# EAGLE board Evals (EAGLE 4.16)
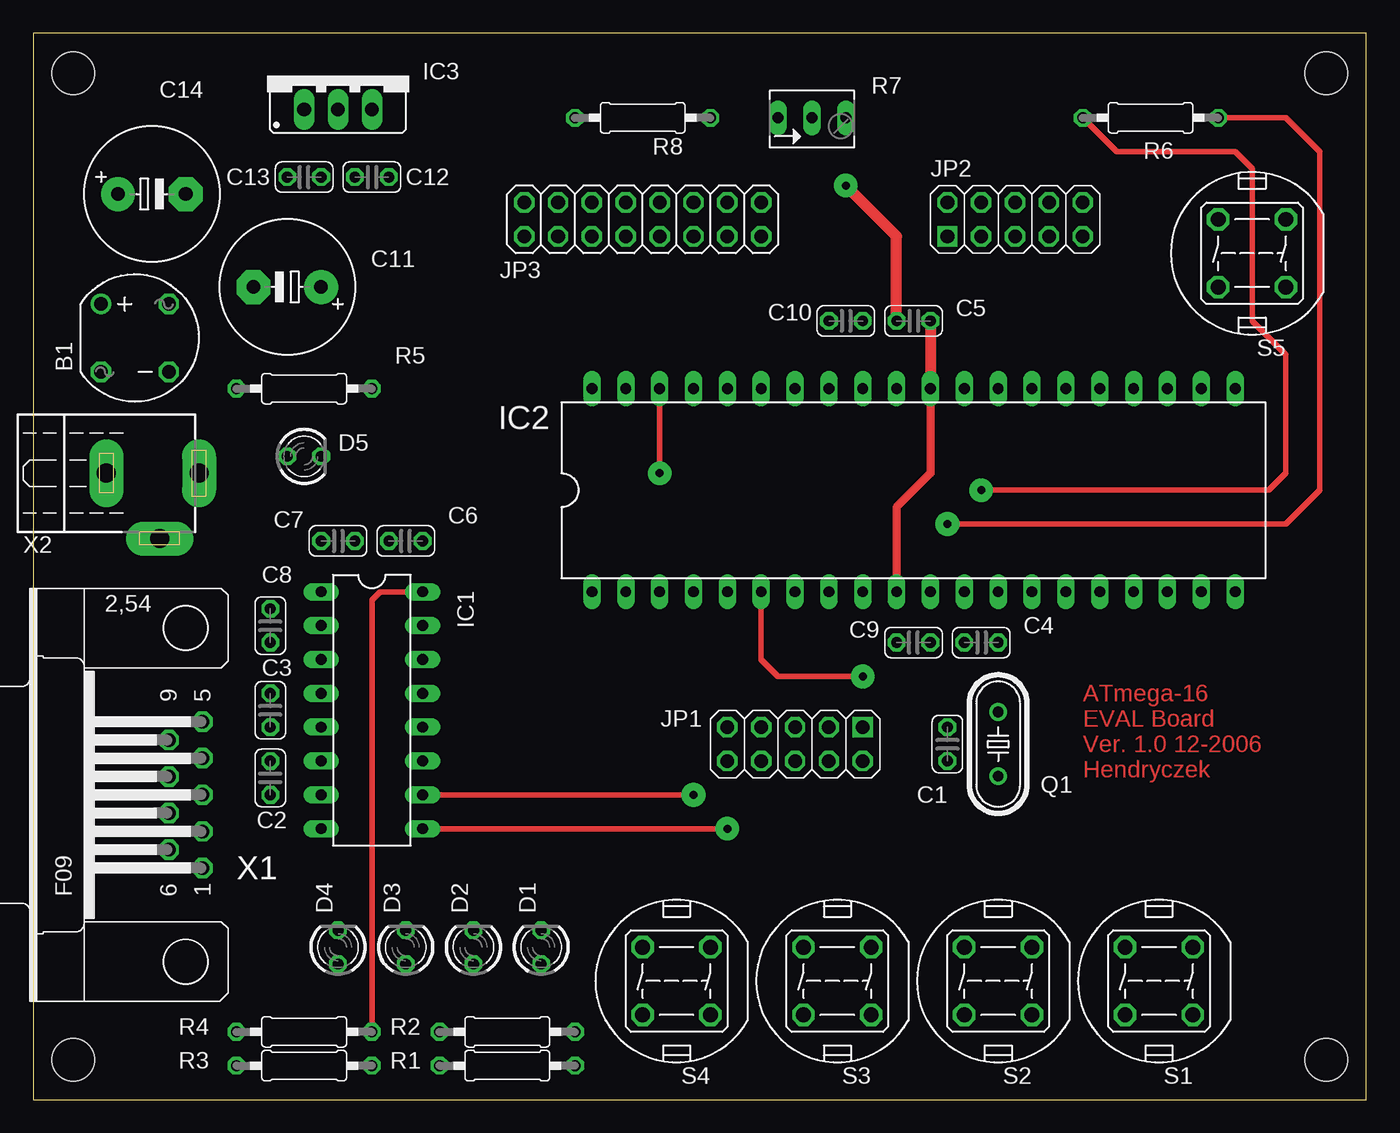
[diagram p0: board, top side]
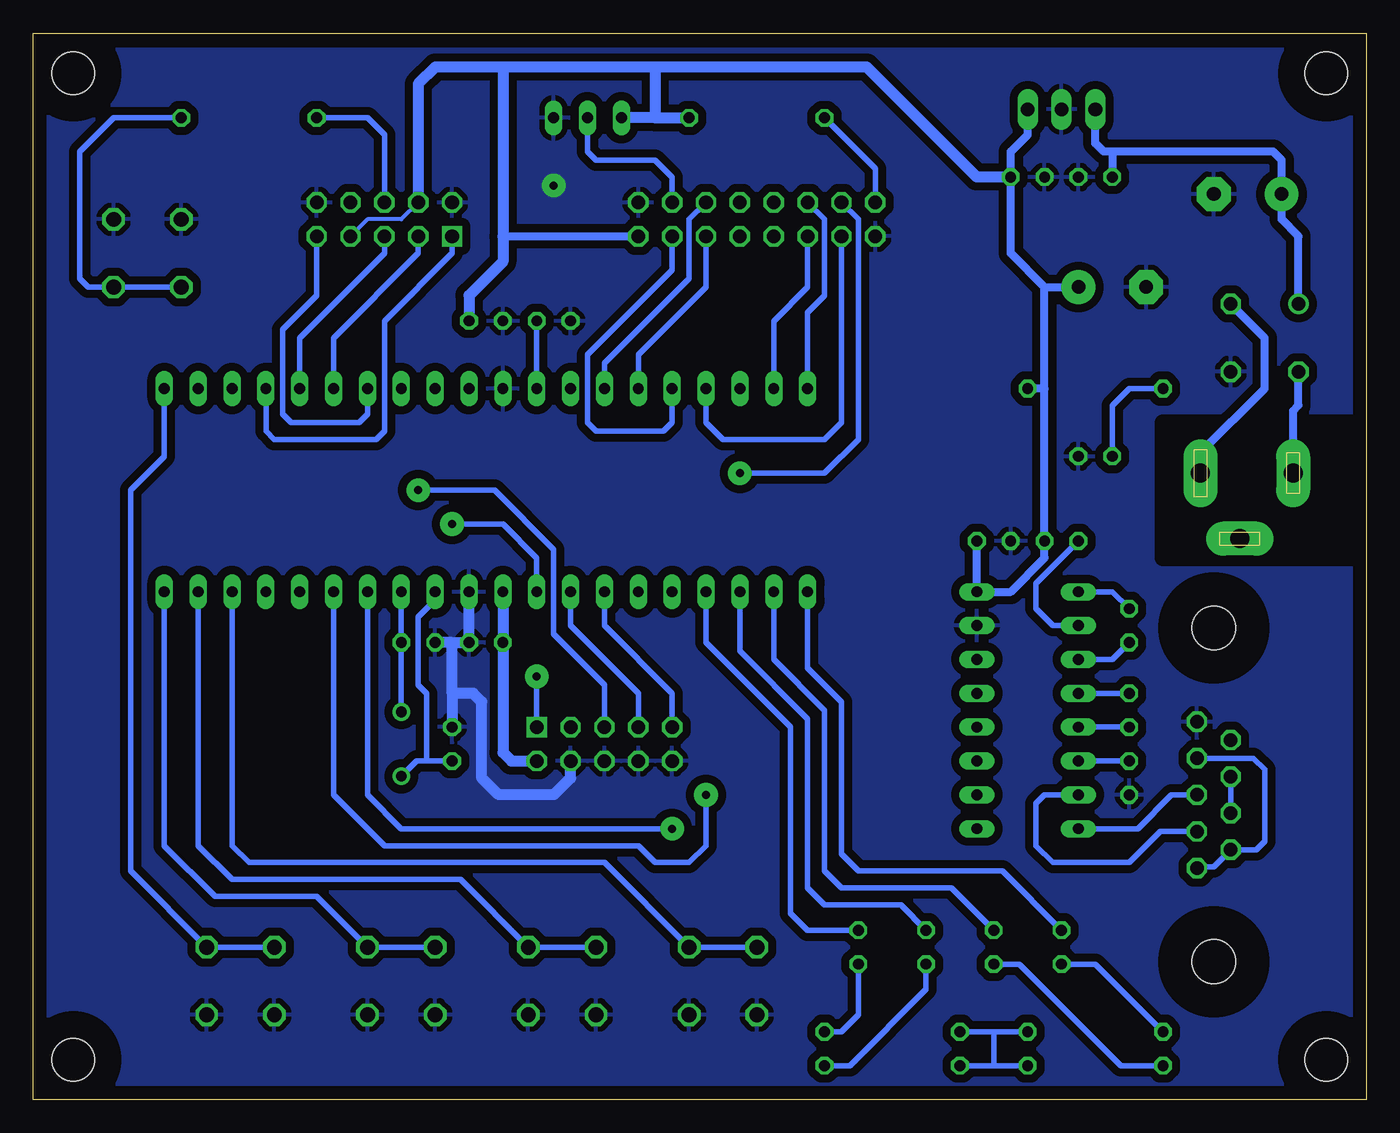
[diagram p1: board, bottom side, seen from below]

Size 100 x 80 mm. Coordinates in mm from the lower left corner, seen from the top.
Outline: 0,0 100,0 100,80 0,80 0,0
Copper layers ([2:1+(((2*4)+(6*8))+((9*11)+(13*15)))+16:15]): Top 0.035mm / dielectric 0.15mm / layer 2 0.035mm / dielectric 0.2mm / layer 4 0.035mm / dielectric 0.15mm / layer 6 0.035mm / dielectric 0.2mm / layer 8 0.035mm / dielectric 0.15mm / layer 9 0.035mm / dielectric 0.2mm / layer 11 0.035mm / dielectric 0.15mm / layer 13 0.035mm / dielectric 0.2mm / layer 15 0.035mm / dielectric 0.15mm / Bottom 0.035mm
Design rules "Eval": minimum track width 8mil, minimum drill 23mil, track to track 8mil, track to pad 8mil, pad to pad 8mil, via to via 8mil, smd to smd 8mil, copper to edge 40mil, drill to drill 8mil, minimum pad ring 10mil, minimum via ring 8mil, stop-mask expansion 4mil, vias tented up to drill 0mil, thermal gap 16mil
Net classes: 1 pup: width 1 mm, drill 254 mm, clearance 0.254 mm
Holes 3.2 mm at 3,3 97,3 97,77 3,77
bRestrict: area 0,40.6 to 15.2,50.8; area 0,74 to 6,80; area 94,74 to 100,80; area 94,0 to 100,6; area 0,0 to 6,6

## Footprints (pad centres in the part's own frame; a part is rotated, then mirrored left to right if it is on the bottom)
RB1A = drill 1.016 round: + -2.54,2.54 | drill 1.016 octagon: - 2.54,-2.54; AC1 2.54,2.54; AC2 -2.54,-2.54
C025-024X044 = drill 0.813 octagon: 1 -1.27,0; 2 1.27,0
E5-10,5 = drill 1.016 pad 2.54 round: + -2.54,0 | drill 1.016 pad 2.54 octagon: - 2.54,0
LED3MM = drill 0.813 octagon: A -1.27,0; K 1.27,0
DIL16 = drill 0.813 long: 1 -8.89,-3.81; 2 -6.35,-3.81; 3 -3.81,-3.81; 4 -1.27,-3.81; 5 1.27,-3.81; 6 3.81,-3.81; 7 6.35,-3.81; 8 8.89,-3.81; 9 8.89,3.81; 10 6.35,3.81; 11 3.81,3.81; 12 1.27,3.81; 13 -1.27,3.81; 14 -3.81,3.81; 15 -6.35,3.81; 16 -8.89,3.81
DIL40 = drill 0.813 long: 1 -24.13,-7.62; 2 -21.59,-7.62; 3 -19.05,-7.62; 4 -16.51,-7.62; 5 -13.97,-7.62; 6 -11.43,-7.62; 7 -8.89,-7.62; 8 -6.35,-7.62; 9 -3.81,-7.62; 10 -1.27,-7.62; 11 1.27,-7.62; 12 3.81,-7.62; 13 6.35,-7.62; 14 8.89,-7.62; 15 11.43,-7.62; 16 13.97,-7.62; 17 16.51,-7.62; 18 19.05,-7.62; 19 21.59,-7.62; 20 24.13,-7.62; 21 24.13,7.62; 22 21.59,7.62; 23 19.05,7.62; 24 16.51,7.62; 25 13.97,7.62; 26 11.43,7.62; 27 8.89,7.62; 28 6.35,7.62; 29 3.81,7.62; 30 1.27,7.62; 31 -1.27,7.62; 32 -3.81,7.62; 33 -6.35,7.62; 34 -8.89,7.62; 35 -11.43,7.62; 36 -13.97,7.62; 37 -16.51,7.62; 38 -19.05,7.62; 39 -21.59,7.62; 40 -24.13,7.62
78XXS = drill 1.016 long: GND 0,-2.54; IN -2.54,-2.54; OUT 2.54,-2.54
2X05 = drill 1.016 square: 1 -5.08,-1.27 | drill 1.016 octagon: 2 -5.08,1.27; 3 -2.54,-1.27; 4 -2.54,1.27; 5 0,-1.27; 6 0,1.27; 7 2.54,-1.27; 8 2.54,1.27; 9 5.08,-1.27; 10 5.08,1.27
2X08 = drill 1.016 octagon: 1 -8.89,-1.27; 2 -8.89,1.27; 3 -6.35,-1.27; 4 -6.35,1.27; 5 -3.81,-1.27; 6 -3.81,1.27; 7 -1.27,-1.27; 8 -1.27,1.27; 9 1.27,-1.27; 10 1.27,1.27; 11 3.81,-1.27; 12 3.81,1.27; 13 6.35,-1.27; 14 6.35,1.27; 15 8.89,-1.27; 16 8.89,1.27
HC49/S = drill 0.813 round: 1 -2.413,0; 2 2.413,0
0207/10@1 = drill 0.813 octagon: 1 -5.08,0; 2 5.08,0
B64Y = drill 0.813 long: A 2.54,0; E -2.54,0; S 0,0
DTE6 = drill 1.118 octagon: 1 -2.54,2.54; 2 2.54,2.54; 3 2.54,-2.54; 4 -2.54,-2.54
F09H = drill 1.016 octagon: 1 -5.486,-1.27; 2 -2.743,-1.27; 3 0,-1.27; 4 2.743,-1.27; 5 5.486,-1.27; 6 -4.115,1.27; 7 -1.372,1.27; 8 1.372,1.27; 9 4.115,1.27 | hole 3.302: -12.522,0; 12.522,0
NEB21R = drill 1.422 pad 2.54 long: + 0,7.35; - 0,0.398; C 4.9,4.4

## Placement (x,y rotation side)
B1  [RB1A]  7.62,57.15 0 top
C1  33pF  [C025-024X044]  68.58,26.67 270 top
C2  100nF  [C025-024X044]  17.78,24.13 90 top
C3  100nF  [C025-024X044]  17.78,29.21 270 top
C4  33pF  [C025-024X044]  71.12,34.29 0 top
C5  100nF  [C025-024X044]  66.04,58.42 0 top
C6  100nF  [C025-024X044]  27.94,41.91 180 top
C7  100nF  [C025-024X044]  22.86,41.91 0 top
C8  100nF  [C025-024X044]  17.78,35.56 270 top
C9  100nF  [C025-024X044]  66.04,34.29 180 top
C10  100nF  [C025-024X044]  60.96,58.42 0 top
C11  470u/25V  [E5-10,5]  19.05,60.96 180 top
C12  100nF  [C025-024X044]  25.4,69.22 0 top
C13  100nF  [C025-024X044]  20.32,69.22 180 top
C14  470u/25V  [E5-10,5]  8.89,67.94 0 top
D1  Red  [LED3MM]  38.1,11.43 90 top
D2  Red  [LED3MM]  33.02,11.43 90 top
D3  Red  [LED3MM]  27.94,11.43 90 top
D4  Red  [LED3MM]  22.86,11.43 90 top
D5  Green  [LED3MM]  20.32,48.26 0 top
IC1  MAX232  [DIL16]  25.4,29.21 270 top
IC2  MEGA16-P  [DIL40]  66.04,45.72 0 top
IC3  7805  [78XXS]  22.86,76.83 0 top
JP1  2x5  [2X05]  57.15,26.67 180 top
JP2  2x5  [2X05]  73.66,66.04 0 top
JP3  2x8  [2X08]  45.72,66.04 180 top
Q1  16MHz  [HC49/S]  72.39,26.67 90 top
R1  220R  [0207/10@1]  35.56,2.54 0 top
R2  220R  [0207/10@1]  35.56,5.08 0 top
R3  220R  [0207/10@1]  20.32,2.54 180 top
R4  220R  [0207/10@1]  20.32,5.08 180 top
R5  220R  [0207/10@1]  20.32,53.34 180 top
R6  510R  [0207/10@1]  83.82,73.66 180 top
R7  10k  [B64Y]  58.42,73.66 0 top
R8  22R  [0207/10@1]  45.72,73.66 180 top
S1  DTE6  [DTE6]  84.45,8.89 180 top
S2  DTE6  [DTE6]  72.39,8.89 180 top
S3  DTE6  [DTE6]  60.33,8.89 180 top
S4  DTE6  [DTE6]  48.26,8.89 180 top
S5  DTE6  [DTE6]  91.44,63.5 180 top
X1  [F09H]  11.43,22.86 90 top
X2  [NEB21R]  5.08,46.99 270 top

## Library data of the parts
B1 = rectifier
C1-C14 R1-R6 R8 = rcl
D1-D5 = led
IC1 = maxim
IC2 = avr
IC3 = v-reg
JP1-JP3 = pinhead
Q1 = crystal
R7 = pot
S1-S5 = switch-misc
X1 = con-subd
X2 = con-lumberg

## Nets
+5V: C5.2 C6.1 C7.2 C9.2 C11.+ C12.2 IC1.16 IC2.10 IC2.30 IC3.OUT JP1.2 JP2.4 JP2.7 JP3.2 R1.1 R2.1 R3.1 R4.1 R5.1 R7.E R8.1
/RESET: IC2.9 R6.1 S5.1 S5.2
/RESET_ISP: JP1.5 JP2.6 R6.2
DB4: IC2.40 JP3.11
DB5: IC2.39 JP3.12
DB6: IC2.38 JP3.13
DB7: IC2.37 JP3.14
E: IC2.35 JP3.6
GND: B1.- C1.1 C2.1 C4.1 C5.1 C6.2 C9.1 C10.1 C11.- C12.1 C13.1 C14.- D5.K IC1.15 IC2.11 IC2.31 IC3.GND JP1.4 JP1.6 JP1.8 JP1.10 JP2.2 JP2.10 JP3.1 JP3.16 R7.A S1.1 S1.2 S2.1 S2.2 S3.1 S3.2 S4.1 S4.2 S5.3 S5.4 X1.5
LED0: D4.K IC2.1
LED1: D3.K IC2.2
LED2: D2.K IC2.3
LED3: D1.K IC2.4
LED-A: JP3.15 R8.2
MISO: IC2.7 JP1.9
MOSI: IC2.6 JP1.1
N$1: D4.A R4.2
N$2: D3.A R3.2
N$3: D2.A R1.2
N$4: D1.A R2.2
N$5: C10.2 IC2.32
N$8: C2.2 IC1.6
N$9: C7.1 IC1.2
N$21: C3.2 IC1.5
N$23: C3.1 IC1.4
N$24: C8.2 IC1.3
N$25: C8.1 IC1.1
N$29: C4.2 IC2.13 Q1.2
N$30: C1.2 IC2.12 Q1.1
N$44: X1.1 X1.4 X1.6
N$45: D5.A R5.2
N$46: B1.AC2 X2.-
N$47: X1.7 X1.8
N$68: B1.AC1 X2.+
N$73: B1.+ C13.2 C14.+ IC3.IN
R/W: IC2.34 JP3.5
RS: IC2.36 JP3.4
RS232-RX0: IC1.8 X1.3
RS232-TX0: IC1.7 X1.2
RXD0: IC1.9 IC2.14
SCK: IC2.8 JP1.7
SW4: IC2.18 S4.3 S4.4
SW5: IC2.19 S3.3 S3.4
SW6: IC2.20 S2.3 S2.4
SW7: IC2.21 S1.3 S1.4
TCK: IC2.24 JP2.1
TDI: IC2.27 JP2.9
TDO: IC2.26 JP2.3
TMS: IC2.25 JP2.5
TXD0: IC1.10 IC2.15
V0: JP3.3 R7.S

## Tracks (layer width: path | path; a pad name or v marks a point on that pad's centre or on a via)
+5V
  Top 0.406: R4.1 25.4,37.47 26.04,38.1 IC1.16
  Top 0.61: IC2.10 64.77,44.45 67.31,46.99 IC2.30
  Top 0.813: C5.2 IC2.30
  Bottom 0.305: JP2.7 74.93,66.04 72.39,66.04 JP2.4
  Bottom 0.406: R3.1 27.94,2.54 | 27.94,2.54 R1.1 | 27.94,5.08 R4.1 | 27.94,5.08 R2.1 | 27.94,2.54 27.94,5.08
  Bottom 0.61: C6.1 IC1.16 26.67,38.1 24.13,40.64 C7.2 24.13,53.34 | 24.13,53.34 24.13,60.96 | 24.13,60.96 C11.+ | 24.13,53.34 R5.1 | 24.13,60.96 26.67,63.5 C12.2 26.67,71.12 25.4,72.39 IC3.OUT | 64.77,64.77 JP3.2
  Bottom 0.813: JP1.2 64.14,25.4 64.77,26.04 C9.2 IC2.10 | 53.34,73.66 R7.E | 53.34,77.47 53.34,73.66 | 53.34,77.47 37.47,77.47 29.21,69.22 C12.2 | 53.34,73.66 R8.1 | 53.34,77.47 64.77,77.47 | 64.77,77.47 64.77,64.77 64.77,62.87 67.31,60.33 C5.2 | JP2.4 71.12,76.2 69.85,77.47 64.77,77.47
/RESET  (via drill 0.6 pad 1.78)
  Top 0.406: v68.58,43.18 93.98,43.18 96.52,45.72 96.52,71.12 93.98,73.66 R6.1
  Bottom 0.406: IC2.9 62.23,40.64 64.77,43.18 v68.58,43.18 | S5.2 S5.1 95.89,60.96 96.52,61.59 96.52,71.12 93.98,73.66 R6.1
/RESET_ISP  (via drill 0.6 pad 1.78)
  Top 0.406: v71.12,45.72 92.71,45.72 93.98,46.99 93.98,55.88 91.44,58.42 91.44,69.85 90.17,71.12 81.28,71.12 R6.2
  Bottom 0.406: JP1.5 57.15,31.11 60.96,34.92 60.96,41.27 65.41,45.72 v71.12,45.72 | JP2.6 73.66,72.39 74.93,73.66 R6.2
DB4
  Bottom 0.406: IC2.40 41.91,59.05 40.64,60.33 40.64,66.04 JP3.11
DB5
  Bottom 0.406: JP3.12 41.91,60.96 44.45,58.42 IC2.39
DB6  (via drill 0.6 pad 1.78)
  Top 0.406: v46.99,46.99 IC2.38
  Bottom 0.406: v46.99,46.99 40.64,46.99 38.1,49.53 38.1,66.04 JP3.13
DB7
  Bottom 0.406: JP3.14 39.37,50.8 40.64,49.53 48.26,49.53 49.53,50.8 IC2.37
E
  Bottom 0.406: IC2.35 54.61,55.88 49.53,60.96 JP3.6
GND  (via drill 0.6 pad 1.78)
  Top 0.813: C5.1 64.77,64.77 v60.96,68.58
  Bottom 0.813: IC2.11 C9.1 68.58,34.29 | 68.58,30.48 C1.1 | 68.58,30.48 68.58,34.29 | 68.58,34.29 C4.1 | JP1.4 59.69,24.13 60.96,22.86 65.09,22.86 66.36,24.13 66.36,29.84 66.99,30.48 68.58,30.48
  pour Bottom (isolate 0.61): 0.64,0.64 0.64,79.38 99.69,79.38 99.69,0.64
LED0
  Bottom 0.406: IC2.1 41.91,32.38 39.37,29.84 39.37,18.41 38.1,17.14 27.3,17.14 D4.K
LED1
  Bottom 0.406: IC2.2 44.45,33.02 40.64,29.21 40.64,17.14 39.37,15.88 31.11,15.88 D3.K
LED2
  Bottom 0.406: IC2.3 46.99,33.66 41.91,28.57 41.91,15.88 40.64,14.61 34.92,14.61 D2.K
LED3
  Bottom 0.406: IC2.4 49.53,34.29 43.18,27.94 43.18,13.97 41.91,12.7 D1.K
LED-A
  Bottom 0.406: JP3.15 36.83,69.85 R8.2
MISO
  Bottom 0.406: JP1.9 52.07,30.48 57.15,35.56 IC2.7
MOSI  (via drill 0.6 pad 1.78)
  Top 0.406: v62.23,31.75 55.88,31.75 54.61,33.02 IC2.6
  Bottom 0.406: v62.23,31.75 JP1.1
N$1
  Bottom 0.406: D4.A 20.32,10.16 R4.2
N$2
  Bottom 0.406: D3.A 26.04,10.16 18.41,2.54 R3.2
N$3
  Bottom 0.406: D2.A 33.02,8.26 38.73,2.54 R1.2
N$4
  Bottom 0.406: R2.2 39.37,5.08 38.1,6.35 D1.A
N$5
  Bottom 0.406: IC2.32 C10.2
N$8
  Bottom 0.406: C2.2 IC1.6
N$9
  Bottom 0.406: IC1.2 23.5,35.56 24.77,36.83 24.77,38.73 C7.1
N$21
  Bottom 0.406: C3.2 IC1.5
N$23
  Bottom 0.406: C3.1 IC1.4
N$24
  Bottom 0.406: C8.2 19.05,33.02 IC1.3
N$25
  Bottom 0.406: C8.1 19.05,38.1 IC1.1
N$29
  Bottom 0.406: Q1.2 C4.2 IC2.13
N$30
  Bottom 0.406: IC2.12 69.85,37.47 71.12,36.2 71.12,31.11 70.48,30.48 70.48,25.4 | 70.48,25.4 C1.2 | Q1.1 71.25,25.4 70.48,25.4
N$44
  Bottom 0.406: X1.1 12.7,17.46 11.44,17.46 X1.6 8.24,18.75 7.62,19.37 7.62,24.77 8.46,25.6 X1.4
N$45
  Bottom 0.406: D5.A 19.05,52.07 17.78,53.34 R5.2
N$46
  Bottom 0.61: X2.- 5.48,51.67 5.08,52.07 B1.AC2
N$47
  Bottom 0.406: X1.7 X1.8
N$68
  Bottom 0.61: X2.+ 12.43,48.53 7.62,53.34 7.62,57.15 B1.AC1
N$73
  Bottom 0.61: B1.+ 5.08,64.77 6.35,66.04 C14.+ 6.35,70.48 6.99,71.12 19.05,71.12 | 19.05,71.12 C13.2 | 19.05,71.12 19.68,71.12 20.32,71.75 IC3.IN
R/W
  Bottom 0.406: JP3.5 50.8,66.04 50.8,61.59 57.15,55.24 IC2.34
RS
  Bottom 0.406: JP3.4 52.07,62.23 58.42,55.88 58.42,50.8 57.78,50.16 52.7,50.16 52.07,50.8 IC2.36
RS232-RX0
  Bottom 0.406: X1.3 14.61,22.86 17.14,20.32 IC1.8
RS232-TX0
  Bottom 0.406: IC1.7 24.13,22.86 24.77,22.23 24.77,19.05 23.5,17.78 17.78,17.78 15.44,20.12 X1.2
RXD0  (via drill 0.6 pad 1.78)
  Top 0.406: IC1.9 v52.07,20.32
  Bottom 0.406: v52.07,20.32 72.39,20.32 74.93,22.86 IC2.14
SCK
  Bottom 0.406: JP1.7 54.61,30.48 59.69,35.56 IC2.8
SW4
  Bottom 0.406: IC2.18 85.09,19.05 83.82,17.78 57.15,17.78 S4.4 S4.3
SW5
  Bottom 0.406: IC2.19 87.63,19.05 85.09,16.51 67.94,16.51 S3.4 S3.3
SW6
  Bottom 0.406: IC2.20 90.17,19.05 86.36,15.24 78.74,15.24 S2.4 S2.3
SW7
  Bottom 0.406: IC2.21 90.17,48.26 92.71,45.72 92.71,17.14 S1.4 S1.3
TCK
  Bottom 0.406: JP2.1 68.58,63.5 73.66,58.42 73.66,50.16 74.3,49.53 81.92,49.53 82.55,50.16 IC2.24
TDI
  Bottom 0.406: IC2.27 74.93,51.44 75.56,50.8 80.64,50.8 81.28,51.44 81.28,57.78 78.74,60.33 JP2.9
TDO
  Bottom 0.406: JP2.3 71.12,63.5 77.47,57.15 IC2.26
TMS
  Bottom 0.406: JP2.5 73.66,63.5 80.01,57.15 IC2.25
TXD0  (via drill 0.6 pad 1.78)
  Top 0.406: IC1.10 v49.53,22.86
  Bottom 0.406: IC2.15 77.47,22.86 73.66,19.05 54.61,19.05 53.34,17.78 50.8,17.78 49.53,19.05 v49.53,22.86
V0
  Bottom 0.406: JP3.3 52.07,69.22 53.34,70.48 57.78,70.48 58.42,71.12 R7.S

## Text on the board
Top: ATmega-16 | EVAL Board | Ver. 1.0 12-2006 | Hendryczek